# Altium PCB Main Board.PcbDoc
Units mil, origin at the board's own origin, x right, y up, seen from the top; angles counter-clockwise.
Board outline 11820 x 5900 mil, 2 copper layers (Top Layer, Bottom Layer); 43 components, 95 nets, 354 pads, 5 vias.
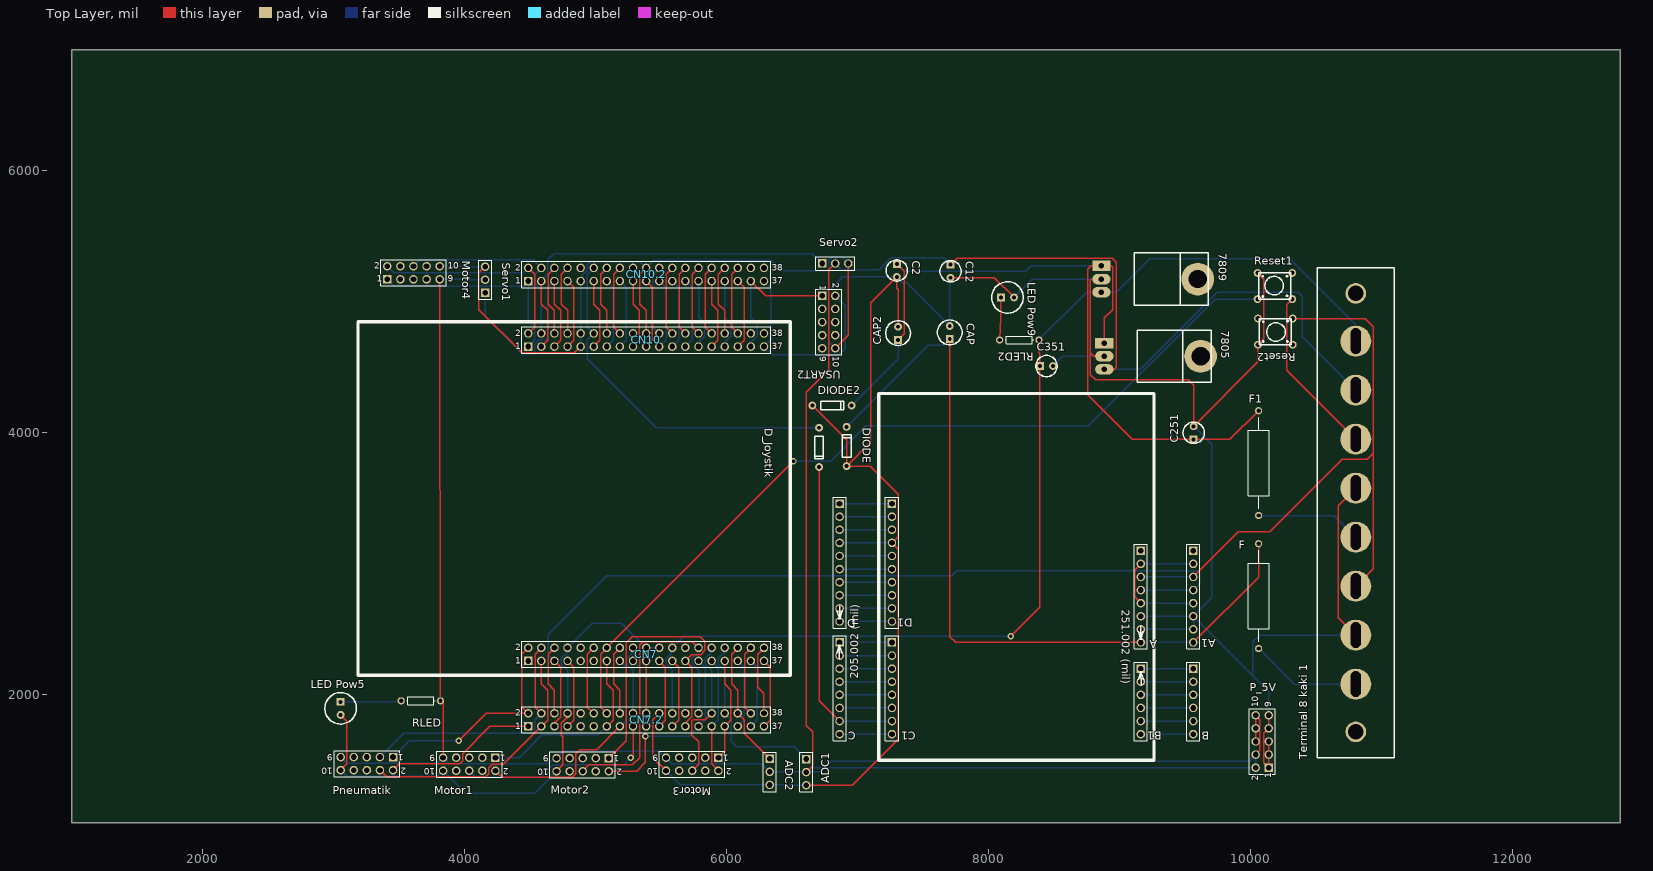
[diagram p0: Top Layer view]
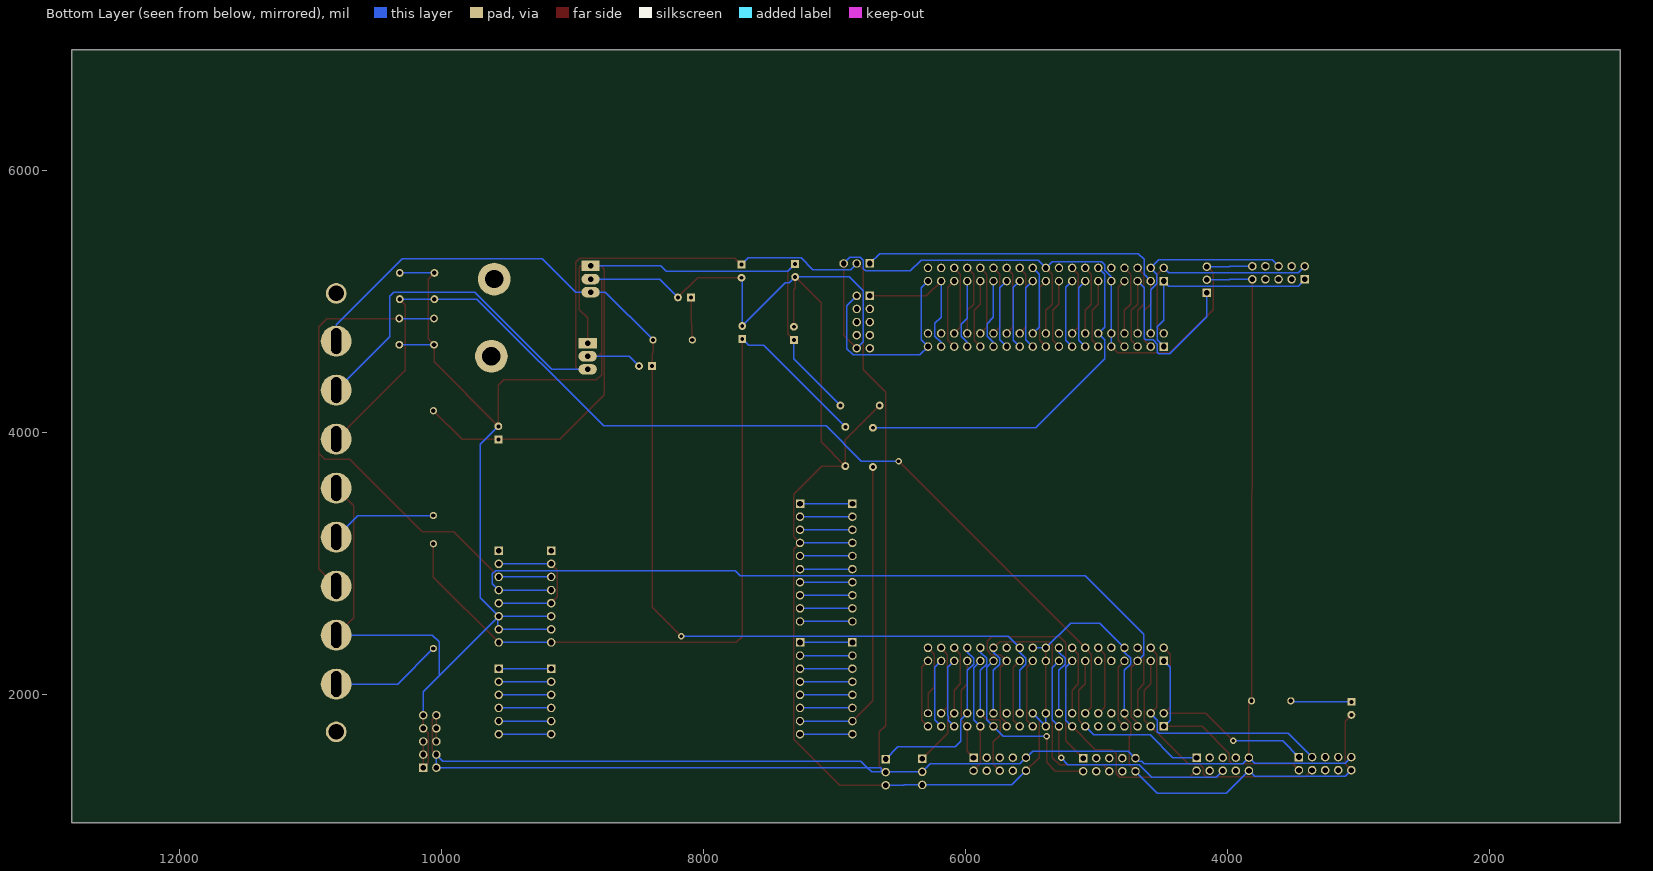
[diagram p1: Bottom Layer view, seen from below]

## Layer stack, top to bottom
Top Solder: solder mask 0.4, Solder Resist, Dk 3.5
Top Layer: signal copper 1.4
Dielectric1: dielectric 12.6, FR-4, Dk 4.8
Bottom Layer: signal copper 1.4
Bottom Solder: solder mask 0.4, Solder Resist, Dk 3.5

## Board outline
1000,1020 1000,6920 12820,6920 12820,1020

## Design rules (kind name [scope] priority, off if disabled: settings)
Clearance [All] p1: gap=10
PolygonConnect [All] p1: connectstyle=Relief reliefconductorwidth=10 reliefentries=4 polygonreliefangle="90 Angle" airgapwidth=10
RoutingVias [All] p1: holewidth=28 width=50 viastyle="Through Hole" minholewidth=28 minwidth=50 maxholewidth=28 maxwidth=50
SilkToSolderMaskClearance SilkscreenOverComponentPads [IsPad] p1: minsilkscreentomaskgap=10 clearancetoexposedcopper=TRUE
SolderMaskExpansion [All] p1: expansion=4
Width [All] p1: maxlimit=10 minlimit=10 preferedwidth=10
29 further rules are at their usual default settings.

## Components (designator, comment, footprint, x,y, rotation, side; value= is the part's Value field where it differs from the comment)
7805 "7805" 78XX/79XX 9122,5063 r0 top
7809 "7809" 78XX/79XX 9100,5652 r0 top
A "Header 8" HDR1X8 9161,3096 r270 top
A1 "Header 8" HDR1X8 9561,3096 r270 top
ADC1 "Header 3" HDR1X3 6607,1506 r270 top
ADC2 "Header 3" HDR1X3 6328,1508 r270 top
B "Header 6" HDR1X6 9561,2196 r270 top
B1 "Header 6" HDR1X6 9161,2196 r270 top
C "Header 8" HDR1X8 6861,2396 r270 top
C1 "Header 8" HDR1X8 7261,2396 r270 top
C2 "cap 1uF/50V" "cap 1uF/50V" 7298,5586 r270 top
C12 "cap 1uF/50V" "cap 1uF/50V" 7708,5580 r270 top
C251 "cap 1uF/50V" "cap 1uF/50V" 9564,3646 r90 top
C351 "cap 1uF/50V" "cap 1uF/50V" 8090,4506 r0 top
CAP "cap 10uF/16V" "cap 10uF/16V" 7702,4812 r90 top
CAP2 "cap 10uF/16V" "cap 10uF/16V" 7308,4806 r90 top
CN7 "Header 19X2" HDR2X19#1 4484,2255 r0 top
CN7.2 "Header 19X2" HDR2X19#2 4484,1755 r0 top
CN10 "Header 19X2" HDR2X19#1 4484,4655 r0 top
CN10.2 "Header 19X2" HDR2X19#1 4484,5155 r0 top
D "Header 10" HDR1X10 6861,3456 r270 top
D1 "Header 10" HDR1X10 7261,3456 r270 top
D_Joystik "Zener" "D Zener" 6605,4035 r270 top
DIODE "Zener" "D Zener" 7015,3742 r90 top
DIODE2 "Zener" "D Zener" 6653,4105 r0 top
F "Inductor Adj" AXIAL-0.8 10060,2750 r90 top
F1 "Inductor Adj" AXIAL-0.8 10060,3765 r90 top
"LED Pow5" "LED sedang" "LED sedang" 3052,1743 r270 top
"LED Pow9" "LED sedang" "LED sedang" 8293,5030 r0 top
Motor1 "Header 5X2" HDR2X5 4234,1517 r180 top
Motor2 "Header 5X2" HDR2X5 5100,1513 r180 top
Motor3 "Header 5X2" HDR2X5 5936,1517 r180 top
Motor4 "Header 5X2" HDR2X5 3408,5168 r0 top
P_5V "Header 5X2" HDR2X5 10137,1440 r90 top
Pneumatik "Header 5X2" HDR2X5 3452,1521 r180 top
Reset1 "pushbutton" pushbutton 10617,5118 r0 top
Reset2 "pushbutton" pushbutton 9755,4768 r180 top
RLED "Res1" AXIAL-0.3 3664,1950 r0 top
RLED2 "Res1" AXIAL-0.3 8233,4705 r0 top
Servo1 "Header 3" HDR1X3 4155,5065 r90 top
Servo2 "Header 3" HDR1X3 6728,5289 r0 top
"Terminal 8 kaki 1" "Terminal Blok 8 Kaki Besar" "TERMINAL 8 KAKI" 11097,1517 r90 top
USART2 "Header 5X2" HDR2X5 6728,5042 r270 top

## Footprints (in the part's own frame and the unit in brackets; to place one, negate y for a bottom-side part, rotate by r counter-clockwise, add the part's x,y. Pads: shape width x height; smd on the part's side, far side on the other; paste and mask are expansions set on the pad)
78XX/79XX [mil]
  round 250 hole 140: 0(495,-482)
  rect 140x80 hole 42: 1(-240,-382)
  oval 140x80 hole 42: 2(-240,-482) 3(-240,-582)
  silkscreen extent 10,-682 575,-282
AXIAL-0.3 [mm] "Axial Device, Thru-Hole; 2 Leads; 0.3 in Pin Spacing"
  round 1.4 hole 0.85: 1(-3.81,0) 2(3.81,0)
  silkscreen extent -2.77,-0.76 2.77,0.76
AXIAL-0.8 [mm] "Axial Device, Thru-Hole; 2 Leads; 0.8 in Pin Spacing"
  round 1.4 hole 0.85: 1(-10.16,0) 2(10.16,0)
  silkscreen extent -8.89,-2.03 8.89,2.03
"cap 1uF/50V" [mil]
  rect 60x60 hole 30: 1(300,0)
  round 60 hole 30: 2(400,0)
  silkscreen extent 269,-81 432,81
"cap 10uF/16V" [mil]
  rect 60x60 hole 30: 1(-100,0)
  round 60 hole 30: 2(0,0)
  silkscreen extent -144,-95 46,95
"D Zener" [mil]
  round 60 hole 30: 1(0,100) 2(300,100)
  silkscreen extent 66,66 238,132
HDR1X3 [mm] "Connector; Header; 3 Position"
  rect 1.65x1.65 hole 1.1: 1(0,0)
  round 1.65 hole 1.1: 2(2.54,0) 3(5.08,0)
  silkscreen extent -1.27,-1.27 6.35,1.27
HDR1X6 [mm] "Connector; Header; 6 Position"
  rect 1.65x1.65 hole 1.1: 1(0,0)
  round 1.65 hole 1.1: 2(2.54,0) 3(5.08,0) 4(7.62,0) 5(10.16,0) 6(12.7,0)
  silkscreen extent -1.27,-1.27 13.97,1.27
HDR1X8 [mm] "Connector; Header; 8 Position"
  rect 1.65x1.65 hole 1.1: 1(0,0)
  round 1.65 hole 1.1: 2(2.54,0) 3(5.08,0) 4(7.62,0) 5(10.16,0) 6(12.7,0) 7(15.24,0) 8(17.78,0)
  silkscreen extent -1.27,-1.27 19.05,1.27
HDR1X10 [mm] "Connector; Header; 10 Position"
  rect 1.65x1.65 hole 1.1: 1(0,0)
  round 1.65 hole 1.1: 2(2.54,0) 3(5.08,0) 4(7.62,0) 5(10.16,0) 6(12.7,0) 7(15.24,0) 8(17.78,0) 9(20.32,0) 10(22.86,0)
  silkscreen extent -1.27,-1.27 24.13,1.27
HDR2X5 [mm] "Connector; Header; 5x2 Position"
  rect 1.65x1.65 hole 1.1: 1(0,0)
  round 1.65 hole 1.1: 2(0,2.54) 3(2.54,0) 4(2.54,2.54) 5(5.08,0) 6(5.08,2.54) 7(7.62,0) 8(7.62,2.54) 9(10.16,0) 10(10.16,2.54)
  silkscreen extent -1.27,-1.27 11.43,3.81
HDR2X19#1 [mm] "Connector; Header; 19x2 Position"
  rect 1.65x1.65 hole 1.1: 1(0,0)
  round 1.65 hole 1.1: 2(0,2.54) 3(2.54,0) 4(2.54,2.54) 5(5.08,0) 6(5.08,2.54) 7(7.62,0) 8(7.62,2.54) 9(10.16,0) 10(10.16,2.54) 11(12.7,0) 12(12.7,2.54) 13(15.24,0) 14(15.24,2.54) 15(17.78,0) 16(17.78,2.54) 17(20.32,0) 18(20.32,2.54) 19(22.86,0) 20(22.86,2.54) 21(25.4,0) 22(25.4,2.54) 23(27.94,0) 24(27.94,2.54) 25(30.48,0) 26(30.48,2.54) 27(33.02,0) 28(33.02,2.54) 29(35.56,0) 30(35.56,2.54) 31(38.1,0) 32(38.1,2.54) 33(40.64,0) 34(40.64,2.54) 35(43.18,0) 36(43.18,2.54) 37(45.72,0) 38(45.72,2.54)
  silkscreen extent -1.27,-1.27 46.99,3.81
HDR2X19#2 [mm] "Connector; Header; 19x2 Position"
  rect 1.65x1.65 hole 1.1: 1(0,0)
  round 1.65 hole 1.1: 2(0,2.54) 3(2.54,0) 4(2.54,2.54) 5(5.08,0) 6(5.08,2.54) 7(7.62,0) 8(7.62,2.54) 9(10.16,0) 10(10.16,2.54) 11(12.7,0) 12(12.7,2.54) 13(15.24,0) 14(15.24,2.54) 15(17.78,0) 16(17.78,2.54) 17(20.32,0) 18(20.32,2.54) 19(22.86,0) 20(22.86,2.54) 21(25.4,0) 22(25.4,2.54) 23(27.94,0) 24(27.94,2.54) 25(30.48,0) 26(30.48,2.54) 27(33.02,0) 28(33.02,2.54) 29(35.56,0) 30(35.56,2.54) 31(38.1,0) 32(38.1,2.54) 33(40.64,0) 34(40.64,2.54) 35(43.18,0) 36(43.18,2.54) 37(45.72,0)
  oval 1.65x1.5 hole 1.1: 38(45.72,2.54)
  silkscreen extent -1.27,-1.27 46.99,3.81
"LED sedang" [mil]
  rect 60x60 hole 30: 1(-200,0)
  round 60 hole 30: 2(-100,0)
  silkscreen extent -270,-120 -30,120
pushbutton [mil]
  round 60 hole 35: 1(-565,-101) 1(-300,-101) 2(-565,99) 2(-300,99)
  silkscreen extent -555,-101 -310,99
"TERMINAL 8 KAKI" [mm] "Terminal Blok Hitam 8 Kaki"
  round 6 hole 2 slot 5 at 0 deg: 1(14.25,7.5) 2(23.75,7.5) 3(33.25,7.5) 4(42.75,7.5) 5(52.25,7.5) 6(61.75,7.5) 7(71.25,7.5) 8(80.75,7.5)
  round 4 hole 3: " "(5,7.5) " "(90,7.5)
  silkscreen extent 0,0 95,15

## Part data
7805 7809: library part 7805/7809/7812/7905/7909/7912
A A1 C C1: "Header, 8-Pin"
ADC1 ADC2 Servo1 Servo2: "Header, 3-Pin"
B B1: "Header, 6-Pin"
CN7 CN7.2 CN10 CN10.2: "Header, 19-Pin, Dual row"
D D1: "Header, 10-Pin"
D_Joystik DIODE DIODE2: library part "D Zener"
F F1: "Adjustable Inductor"
Motor1 Motor2 Motor3 Motor4 P_5V Pneumatik USART2: "Header, 5-Pin, Dual row"
RLED RLED2: "Resistor"
"Terminal 8 kaki 1": library part "Terminal Block 8 kaki"

## Via types
v1: diameter 50, hole 28, Top Layer to Bottom Layer, 5 vias

## Nets (pads, with @x,y where several pads share a name; then routed paths per layer and width w, separated by ;. In a path a pad name is that pad's centre, name@x,y a point inside that pad or via, vN(x,y) a via of type N, cw(c..) or ccw(c..) an arc to the next point about the centre after c; other vN are vias at no path point)
3.3V: A1.4 A.4 CN7.2.5 CN7.5 | length 6491.9
  Top Layer w10: CN7.2.5 4684,1781 4732,1829 4732,2207 CN7.5
  Bottom Layer w10: CN7.5 4636,2303 4636,2460 5082,2906 7718,2906 7756,2944 9585,2944 9609,2920 9609,2844 A1.4 A.4
3V3: CN7.2.16 CN7.16 | length 539.8
  Top Layer w10: CN7.2.16 5184,2031 5136,2079 5136,2307 CN7.16
5V: CN7.2.18 CN7.18 | length 539.3
  Bottom Layer w10: CN7.2.18 5284,2183.28 5236.52,2230.76 5236.52,2274.67 5284,2322.15 CN7.18
"A4 - SDA": D1.2 D.2 | length 400
  Bottom Layer w10: D.2 D1.2
"A5 SCL": D1.1 D.1 | length 400
  Bottom Layer w10: D.1 D1.1
AGND: CN10.2.32 CN10.32 | length 539.8
  Top Layer w10: CN10.32 5984,4931 5936,4979 5936,5207 CN10.2.32
ANALOG0: B1.1 B.1 | length 400
  Bottom Layer w10: B1.1 B.1
ANALOG1: B1.2 B.2 | length 400
  Bottom Layer w10: B1.2 B.2
ANALOG2: B1.3 B.3 | length 400
  Bottom Layer w10: B1.3 B.3
ANALOG3: B1.4 B.4 | length 400
  Bottom Layer w10: B1.4 B.4
"ANALOG4 - SDA": B1.5 B.5 | length 400
  Bottom Layer w10: B1.5 B.5
"ANALOG5 - SCL": B1.6 B.6 | length 400
  Bottom Layer w10: B1.6 B.6
AREF: D1.3 D.3 | length 400
  Bottom Layer w10: D.3 D1.3
AVDD: CN10.2.7 CN10.7 | length 539.8
  Top Layer w10: CN10.7 4832,4703 4832,5107 CN10.2.7
BOOT0: CN7.2.7 CN7.7 | length 539.8
  Top Layer w10: CN7.2.7 4832,1803 4832,2207 CN7.7
E5V: CN7.2.6 CN7.6 | length 539.8
  Top Layer w10: CN7.2.6 4684,2031 4636,2079 4636,2307 CN7.6
FUSE1: "Terminal 8 kaki 1.1" F.1 | length 854.4
  Bottom Layer w10: F.1 10331.98,2078.02 10801.72,2078.02
FUSE2: "Terminal 8 kaki 1.4" F1.1 | length 810
  Bottom Layer w10: F1.1 10636.79,3365 10801.72,3200.07
GND: 7805.2 7809.2 "LED Pow5.2" "LED Pow9.2" "Terminal 8 kaki 1.2" "Terminal 8 kaki 1.5" A1.6 A1.7 A.6 A.7 ADC1.3 ADC2.3 C2.2 C12.2 C251.2 C351.2 CAP2.2 CAP.2 CN7.2.8 CN7.2.19 CN7.2.20 CN7.2.22 CN7.8 CN7.19 CN7.20 CN7.22 CN10.2.9 CN10.2.20 CN10.9 CN10.10 CN10.20 D1.4 D.4 DIODE2.1 DIODE.1 Motor1.10 Motor2.10 Motor3.10 Motor4.10 P_5V.1 P_5V.3 P_5V.5 P_5V.7 P_5V.9 Pneumatik.10 Reset1.2 Reset2.2 Servo1.3 Servo2.3 USART2.10 | length 32474.6
  Top Layer w10: Pneumatik.10 3100,1469 3100,1795 3052,1843 ; Servo1.3 4107,5217 4107,4937 4437,4607 4836,4607 CN10.9 ; Motor2.10 4748,1461 4748,1676 4736,1688 4736,1780 4775,1819 4784,1819 CN7.2.8 ; CN7.2.20 CN7.19 CN7.20 ; CN10.20 5384,4931 5336,4979 5336,5207 CN10.2.20 ; CN7.2.22 5436,1807 5436,1517 Motor3.10 ; ADC1.3 6957,1306 7309,1658 7309,3108 D1.4 7309,3204 7309,3527 7094,3742 DIODE.1 ; DIODE2.1 6915,3943 DIODE.1 ; USART2.10 6928,4742 Servo2.3 ; CAP2.2 7308,5090.16 7298,5100.16 C2.2 7100,4988 7100,3927 DIODE.1 ; C12.2 8043,5180 8193,5030 ; 7809.2 8785,5170 8775,5160 8775,4606 ; 7805.2 8800,4581 8775,4606 ; Reset1.2@10052,5217 10100,5169 10100,4714 10055,4669 10055,4537 C251.2 9564,4360 9524,4400 8815,4400 8775,4440 8775,4606 ; P_5V.5 P_5V.3 P_5V.1 10099,1478 10099,1702 P_5V.7 P_5V.9 ; 10801.72,2452.04 10668,2585.76 10668,3440.36 10801.72,3574.09
  Bottom Layer w10: Pneumatik.10 3100,1373 3790,1373 Motor1.10 4006,1245 4532,1245 Motor2.10 ; Motor4.10 3982,5268 3985,5265 Servo1.3 ; CN7.2.8 4784,2183.28 4736.52,2230.76 4736.52,2274.67 4784,2322.15 CN7.8 4972,2543 5196,2543 CN7.20 CN7.22 ; CN10.9 4893,4655 4886.77,4659.15 4884,4661 CN10.10 CN10.2.9 4884,5186.52 4934,5236.52 4934,5280 4957,5303 5336,5303 CN10.2.20 5443,5314 6337,5314 6418,5233 6761,5233 6778,5250 6778,5315 6800,5337 6880,5337 Servo2.3 ; CN7.2.20 CN7.2.19 CN7.2.22 ; Motor3.10 5645,1308 ADC2.3 6466,1308 6468,1306 ADC1.3 ; USART2.10 6778,4692 6778,5080 6884,5186 C2.2 7343,5141 7373,5141 CAP.2 7702,5172 7711,5181 C12.2 ; D.4 D1.4 ; 8193,5030 8333,5170 7809.2 ; C351.2 8565,4581 7805.2 ; A.7 A1.7 9569,2504 A1.6@9569,2588 ; A.6 A1.6 ; C251.2 9701,3909 9701,2736 A1.6 ; Reset1.2@10052,5217 Reset1.2@10317,5217 ; Reset2.2@10055,4669 Reset2.2@10320,4669 ; P_5V.9 10137,2020 10017,2140 ; 10801.72,2452.04 10069.04,2452.04 10017,2400 10017,2140 ; A1.6 A1.6@9569,2588 ; A1.6@9569,2588 10017,2140
"IO0 - RX": C1.8 C.8 | length 400
  Bottom Layer w10: C.8 C1.8
"IO1 - TX": C1.7 C.7 D_Joystik.2 | length 2403.6
  Top Layer w10: D_Joystik.2 6705,1952 C.7
  Bottom Layer w10: C.7 C1.7
"IO2 - INT0 - PWM": C1.6 C.6 | length 400
  Bottom Layer w10: C.6 C1.6
"IO3 - INT1 - PWM": C1.5 C.5 | length 400
  Bottom Layer w10: C.5 C1.5
IO4: C1.4 C.4 | length 400
  Bottom Layer w10: C.4 C1.4
"IO5 - PWM": C1.3 C.3 | length 400
  Bottom Layer w10: C.3 C1.3
"IO6 - PWM": C1.2 C.2 | length 400
  Bottom Layer w10: C.2 C1.2
IO7: C1.1 C.1 | length 400
  Bottom Layer w10: C.1 C1.1
IO8: D1.10 D.10 | length 400
  Bottom Layer w10: D.10 D1.10
"IO9 - PWM": D1.9 D.9 | length 400
  Bottom Layer w10: D.9 D1.9
"IO10 - PWM - SS": D1.8 D.8 | length 400
  Bottom Layer w10: D.8 D1.8
"IO11 - PWM - MOSI": D1.7 D.7 | length 400
  Bottom Layer w10: D.7 D1.7
"IO12 - PWM - MISO": D1.6 D.6 | length 400
  Bottom Layer w10: D.6 D1.6
"IO13 - SCK": D1.5 D.5 | length 400
  Bottom Layer w10: D.5 D1.5
IOREF: CN7.2.12 CN7.12 | length 539.8
  Top Layer w10: CN7.2.12 4936,1903 4936,2307 CN7.12
"NetLED Pow5_1": "LED Pow5.1" RLED.1 | length 464.9
  Bottom Layer w10: 3052,1943 3507,1943 RLED.1
"NetLED Pow9_1": "LED Pow9.1" RLED2.1 | length 325.3
  Top Layer w10: RLED2.1 8093,4878 8093,5030
PA_0: CN7.2.28 CN7.28 Motor2.6 | length 2360
  Top Layer w10: Motor2.6 4948,1461 5280,1461 5334,1515 5334,2380 5357,2403 5736,2403 CN7.28
  Bottom Layer w10: CN7.2.28 5784,2183.28 5736.52,2230.76 5736.52,2274.67 5784,2322.15 CN7.28
PA_1: CN7.2.30 CN7.30 Motor3.6 | length 1139.4
  Top Layer w10: Motor3.6 5784,1465 5784,1636 5731.48,1688.52 5731.48,1800.2 5738.29,1807 5836,1807 CN7.2.30
  Bottom Layer w10: CN7.2.30 5884,2183.28 5836.52,2230.76 5836.52,2274.67 5884,2322.15 CN7.30
PA_2: CN10.2.35 CN10.35 USART2.1 | length 1130.1
  Top Layer w10: CN10.2.35 6297,5042 USART2.1
  Bottom Layer w10: CN10.35 6184,4687.85 6231.48,4735.33 6231.48,4832.52 6184,4880 CN10.2.35
PA_3: CN10.2.37 CN10.37 USART2.2 | length 1641.1
  Bottom Layer w10: CN10.2.37 6337,5102 6337,4708 CN10.37 6346,4593 6856,4593 6903,4640 6903,4967 USART2.2
PA_4: ADC1.1 CN7.2.32 CN7.32 | length 1403.5
  Bottom Layer w10: CN7.32 5984,2322.15 5936.52,2274.67 5936.52,2230.76 5984,2183.28 CN7.2.32 6034,1805 6034,1640 6075,1599 6514,1599 ADC1.1
PA_5: CN10.2.11 CN10.11 | length 539.8
  Top Layer w10: CN10.11 5032,4703 5032,4931 4984,4979 CN10.2.11
PA_6: CN10.2.13 CN10.13 | length 542.2
  Bottom Layer w10: CN10.13 5131.48,4702.48 5131.48,5105.52 5082,5155 CN10.2.13
PA_7: CN10.2.15 CN10.15 | length 539.8
  Bottom Layer w10: CN10.15 5232,4703 5232,5107 CN10.2.15
PA_8: CN10.2.23 CN10.23 | length 540.6
  Bottom Layer w10: CN10.23 5633,4704 5633,5106 CN10.2.23
PA_9: CN10.2.21 CN10.21 | length 543.1
  Bottom Layer w10: CN10.21 5536,4707 5536,5103 CN10.2.21
PA_10: CN10.2.33 CN10.33 | length 539.8
  Top Layer w10: CN10.33 6132,4703 6132,5107 CN10.2.33
PA_11: CN10.2.14 CN10.14 | length 539.8
  Top Layer w10: CN10.14 5084,4931 5036,4979 5036,5207 CN10.2.14
PA_12: CN10.2.12 CN10.12 D_Joystik.1 | length 2741.1
  Bottom Layer w10: CN10.2.12 4936,5207 4936,4803 CN10.12 4936,4707 4936,4560 5461,4035 D_Joystik.1
PA_13: CN7.2.13 CN7.13 Motor1.1 | length 1488.3
  Top Layer w10: CN7.2.13 5132,1803 5132,2031 5084,2079 CN7.13
  Bottom Layer w10: Motor1.1 4414,1517 4587,1690 5019,1690 CN7.2.13
PA_14: CN7.2.15 CN7.15 Motor1.2 | length 1765.9
  Top Layer w10: Motor1.2 4286,1365 4820,1365 4848,1393 4848,1546 4880,1578 5007,1578 CN7.2.15
  Bottom Layer w10: CN7.2.15 5187,1755 5234,1802 5234,2205 CN7.15
PA_15: CN7.2.17 CN7.17 Motor1.6 | length 2105.7
  Top Layer w10: v1(5268,1515) 5284,1531 CN7.2.17
  Bottom Layer w10: Motor1.6 4084,1367 4575,1367 4671,1463 5216,1463 v1(5268,1515) ; CN7.2.17 5336,1807 5336,2203 CN7.17
PB_0: ADC2.1 CN7.2.34 CN7.34 | length 987.8
  Top Layer w10: CN7.34 6036,2307 6036,2079 6084,2031 CN7.2.34 6132,1807 6132,1704 ADC2.1
PB_1: CN10.2.24 CN10.24 | length 539.8
  Top Layer w10: CN10.24 5536,4803 5536,5207 CN10.2.24
PB_2: CN10.2.22 CN10.22 | length 539.8
  Bottom Layer w10: CN10.22 5436,4803 5436,5207 CN10.2.22
PB_3: CN10.2.31 CN10.31 | length 539.3
  Bottom Layer w10: CN10.31 5984,4687.85 6031.48,4735.33 6031.48,4824.52 5984,4872 CN10.2.31
PB_4: CN10.2.27 CN10.27 | length 539.3
  Bottom Layer w10: CN10.27 5784,4687.85 5831.48,4735.33 5831.48,4830.48 5784,4877.96 CN10.2.27
PB_5: CN10.2.29 CN10.29 | length 539.8
  Top Layer w10: CN10.29 5932,4703 5932,4931 5884,4979 CN10.2.29
PB_6: CN10.2.17 CN10.17 | length 539.8
  Top Layer w10: CN10.17 5332,4703 5332,4931 5284,4979 CN10.2.17
PB_7: CN7.2.21 CN7.21 | length 539.8
  Top Layer w10: CN7.2.21 5532,1803 5532,2207 CN7.21
PB_8: CN10.2.3 CN10.3 Servo2.1 | length 2868.8
  Top Layer w10: CN10.3 4632,4703 4632,4931 4584,4979 CN10.2.3
  Bottom Layer w10: CN10.2.3 4634,5205 4634,5320 4678,5364 6653,5364 Servo2.1
PB_9: CN10.2.5 CN10.5 Servo1.1 | length 1861.5
  Top Layer w10: CN10.5 4732,4703 4732,4931 4684,4979 CN10.2.5
  Bottom Layer w10: Servo1.1 4155,4882 4437,4600 4524,4600 4534,4610 4534,4673 4566,4705 4620,4705 4634,4719 4634,5105 CN10.2.5
PB_10: CN10.2.25 CN10.25 | length 542.2
  Bottom Layer w10: CN10.25 5735,4706 5735,5104 CN10.2.25
PB_12: CN10.2.16 CN10.16 | length 539.8
  Top Layer w10: CN10.16 5136,4803 5136,5207 CN10.2.16
PB_13: CN10.2.30 CN10.30 | length 539.8
  Top Layer w10: CN10.30 5836,4803 5836,5207 CN10.2.30
PB_14: CN10.2.28 CN10.28 | length 539.8
  Top Layer w10: CN10.28 5736,4803 5736,5207 CN10.2.28
PB_15: CN10.2.26 CN10.26 | length 539.8
  Top Layer w10: CN10.26 5636,4803 5636,5207 CN10.2.26
PC_0: CN7.2.38 CN7.38 | length 539.8
  Top Layer w10: CN7.2.38 6284,2007 6236,2055 6236,2307 CN7.38
PC_1: CN7.2.36 CN7.36 | length 539.8
  Top Layer w10: CN7.2.36 6136,1903 6136,2307 CN7.36
PC_2: CN7.2.35 CN7.35 | length 541.4
  Bottom Layer w10: CN7.2.35 6234,1805 6234,2205 CN7.35
PC_3: CN7.2.37 CN7.37 | length 539.8
  Top Layer w10: CN7.2.37 6332,1803 6332,2207 CN7.37
PC_4: CN10.2.34 CN10.34 | length 539.8
  Top Layer w10: CN10.34 6036,4803 6036,5207 CN10.2.34
PC_5: CN10.2.6 CN10.6 | length 539.8
  Top Layer w10: CN10.6 4684,4931 4636,4979 4636,5207 CN10.2.6
PC_6: CN10.2.4 CN10.4 Motor4.6 | length 1560.5
  Bottom Layer w10: Motor4.6 3656,5316 4523,5316 CN10.2.4 4536.52,5207.52 4536.52,5134.85 4584,5087.37 CN10.4
PC_7: CN10.2.19 CN10.19 | length 539.8
  Top Layer w10: CN10.19 5432,4703 5432,5107 CN10.2.19
PC_8: CN10.2 CN10.2.2 Motor4.2 | length 1652.6
  Top Layer w10: CN10.2 4532,4803 4532,5207 CN10.2.2
  Bottom Layer w10: Motor4.2 3459,5217 4446,5217 CN10.2.2
PC_9: CN10.1 CN10.2.1 Motor4.1 | length 1655.1
  Bottom Layer w10: Motor4.1 3459,5117 4446,5117 CN10.2.1 4484,4856 4535,4805 4535,4706 CN10.1
PC_10: CN7.1 CN7.2.1 Pneumatik.2 | length 1741.9
  Top Layer w10: Pneumatik.2 3500,1469 3960,1469 3984,1493 3984,1548 4191,1755 CN7.2.1
  Bottom Layer w10: CN7.2.1 4436.52,1802.48 4436.52,2207.52 CN7.1
PC_11: CN7.2 CN7.2.2 Pneumatik.1 | length 1710.1
  Top Layer w10: v1(3954,1646) 4163,1855 CN7.2.2 4436,1903 4436,2307 CN7.2
  Bottom Layer w10: Pneumatik.1 3577,1646 v1(3954,1646)
PC_12: CN7.2.3 CN7.3 Pneumatik.4 | length 1980.7
  Top Layer w10: Pneumatik.4 3404,1369 4160,1369 4184,1393 4184,1440 4209,1465 4294,1465 CN7.2.3 4632,1803 4632,2031 4584,2079 CN7.3
PC_13: CN7.2.23 CN7.23 | length 539.8
  Top Layer w10: CN7.2.23 5632,1803 5632,2207 CN7.23
PC_14: CN7.2.25 CN7.25 Motor2.1 | length 2357
  Top Layer w10: Motor2.1 5234,1647 5234,2393 5280,2439 5797,2439 5832,2404 5832,2335 5800,2303 5732,2303 CN7.25 5732,2207 5732,1829 5684,1781 CN7.2.25
PC_15: CN7.2.27 CN7.27 Motor2.2 | length 1484.8
  Top Layer w10: Motor2.2 5312,1413 5379,1480 v1(5379,1681)
  Bottom Layer w10: v1(5379,1681) 5710,1681 CN7.2.27 5834,1805 5834,2205 CN7.27
PD_2: CN7.2.4 CN7.4 Pneumatik.3 | length 1962.2
  Top Layer w10: CN7.2.4 4536,1903 4536,2307 CN7.4
  Bottom Layer w10: Pneumatik.3 3533,1702 4520,1702 4532,1714 4532,1803 CN7.2.4
PH_0: CN7.2.29 CN7.29 Motor3.2 | length 903.8
  Top Layer w10: CN7.2.29 5884,1469 Motor3.2
  Bottom Layer w10: CN7.2.29 5886,1755 5936,1805 5936,2203 CN7.29
PH_1: CN7.2.31 CN7.31 Motor3.1 | length 797.6
  Top Layer w10: Motor3.1 5984,1565 CN7.2.31 6032,1803 6032,2031 5984,2079 CN7.31
RESET: "Terminal 8 kaki 1.6" CN7.2.14 CN7.14 Reset1.1 | length 8179.9
  Top Layer w10: CN7.2.14 5036,1903 5036,2307 CN7.14 v1(6509,3780) ; Reset1.1@10317,5017 10275,4975 10275,4474.83 10801.72,3948.1
  Bottom Layer w10: v1(6509,3780) 6793,3780 7062,4049 8760,4049 9728,5017 10052,5017 Reset1.1@10317,5017
RESET_ARD: "Terminal 8 kaki 1.3" A1.3 A.3 Reset2.1 | length 5106.8
  Top Layer w10: A1.3 9905,3240 10145,3240 10698,3793 10888,3793 10935,3840 ; Reset2.1@10320,4869 10873,4869 10935,4807 10935,3840 ; 10801.72,2826.06 10935,2959.33 10935,3840
  Bottom Layer w10: A.3 A1.3 ; Reset2.1@10055,4869 Reset2.1@10320,4869
U5V: CN10.2.8 CN10.8 | length 539.8
  Top Layer w10: CN10.8 4784,4931 4736,4979 4736,5207 CN10.2.8
VBAT: CN7.2.33 CN7.33 | length 539.3
  Bottom Layer w10: CN7.2.33 6131,1802 6131,1834.37 6131.48,1834.85 6131.48,2207.52 CN7.33
VCC: 7805.3 "Terminal 8 kaki 1.7" ADC1.2 ADC2.2 C12.1 Motor1.9 Motor2.9 Motor3.9 Motor4.9 P_5V.2 P_5V.4 P_5V.6 P_5V.8 P_5V.10 Pneumatik.9 RLED.2 Servo1.2 Servo2.2 | length 25100.7
  Top Layer w10: Motor4.9 3808,3565 3814,3559 RLED.2 3834,1930 Motor1.9 ; ADC1.2 6655,1454 6655,1714 6608,1761 6608,4305 6780,4477 6780,5241 Servo2.2 ; C12.1 7758,5330 8944,5330 8974,5300 8974,4495 8960,4481 7805.3 ; P_5V.4 10070,1573 10070,1807 P_5V.10 P_5V.8 P_5V.6
  Bottom Layer w10: Pneumatik.9 3100,1473 3790,1473 Motor1.9 3882,1469 4632.52,1469 4650.75,1487.24 4674.24,1487.24 Motor2.9 4754,1567 5486,1567 Motor3.9 5584,1469 6267,1469 ADC2.2 ADC1.2@6609,1408 ; Motor4.9 3982,5168 3985,5165 Servo1.2 ; ADC1.2 ADC1.2@6609,1408 ; Servo2.2 6875.48,5241.52 7163.52,5241.52 7253,5331 7657,5331 C12.1 ; 7805.3 9156,4481 9745,5070 10364,5070 10394,5040 10394,4729.84 10801.72,4322.12 ; ADC1.2@6609,1408 6641,1408 ; 6641,1408 6715,1408 6747,1440 ; 6641,1408 6641,1440 6747,1440 ; 6747,1440 6797,1490 9987,1490 P_5V.4 P_5V.2 6747,1440
VCC2: A1.2 A1.5 A.2 A.5 | length 1139.8
  Top Layer w10: A.5 9113,2744 9113,2948 A.2
  Bottom Layer w10: A.5 A1.5 ; A.2 A1.2
VIN: 7809.3 "Terminal 8 kaki 1.8" C351.1 CN7.2.24 CN7.24 RLED2.2 | length 8526
  Top Layer w10: v1(8168,2444) 8390,2666 C351.1 8390,4602 8383,4609 RLED2.2
  Bottom Layer w10: CN7.2.24 5584,2183.28 5536.52,2230.76 5536.52,2274.67 5584,2322.15 CN7.24 5673,2444 v1(8168,2444) ; RLED2.2 8748,5070 7809.3 8975,5070 9230,5325 10299,5325 10801.72,4822.28 10801.72,4696.13
VIN2: A1.8 A.8 CAP.1 DIODE.2 F.2 | length 6174.3
  Top Layer w10: CAP.1 7702,2440 7746,2396 A.8 ; A1.8 10060,2895 F.2
  Bottom Layer w10: DIODE.2 7536,4663 7652,4663 7700,4711 CAP.1 ; A.8 A1.8
VIN12: 7805.1 7809.1 C2.1 C251.1 CAP2.1 DIODE2.2 F1.2 | length 6174.4
  Top Layer w10: C2.1 7353,5231 7353,4751 CAP2.1 ; 7805.1 8882,4873 8945,4936 8945,5260 8935,5270 7809.1 8780,5270 8755,5245 8755,4288 9097,3946 C251.1 9841,3946 F1.2
  Bottom Layer w10: DIODE2.2 7308,4560 CAP2.1 ; C2.1 7353,5231 8284,5231 8323,5270 7809.1
pads on no net: 7805.0 7809.0 "Terminal 8 kaki 1. " A1.1 A.1 CN7.2.9 CN7.2.10 CN7.2.11 CN7.2.26 CN7.9 CN7.10 CN7.11 CN7.26 CN10.2.10 CN10.2.18 CN10.2.36 CN10.2.38 CN10.18 CN10.36 CN10.38 Motor1.3 Motor1.4 Motor1.5 Motor1.7 Motor1.8 Motor2.3 Motor2.4 Motor2.5 Motor2.7 Motor2.8 Motor3.3 Motor3.4 Motor3.5 Motor3.7 Motor3.8 Motor4.3 Motor4.4 Motor4.5 Motor4.7 Motor4.8 Pneumatik.5 Pneumatik.6 Pneumatik.7 Pneumatik.8 USART2.3 USART2.4 USART2.5 USART2.6 USART2.7 USART2.8 USART2.9

## Silkscreen, mask and mechanical layers (free items; w line width, h text height)
Top Overlay:
  lines w10: 6839.71,2313.1 6860,2373 ; 6841.29,2638.1 6861,2578 ; 6850,2373.05 6870,2372.95 ; 6851,2578.05 6871,2577.95 ; 6859.51,2273 6860,2373 ; 6861.49,2678 6861,2578 ; 6879.71,2312.9 6860,2373 ; 6881.29,2637.9 6861,2578 ; 9140.76,2481.92 9161,2422 ; 9142.24,2110.92 9162,2171 ; 9151,2421.96 9171,2422.04 ; 9152,2170.96 9172,2171.04 ; 9160.6,2522 9161,2422 ; 9162.4,2071 9162,2171 ; 9180.76,2482.08 9161,2422 ; 9182.24,2111.08 9162,2171
  lines w25: 3184,2145 3184,4845 6484,4845 6484,2145 3184,2145 ; 7161,1496 9261,1496 9261,4296 7161,4296 7161,1496
  text "251.002 (mil)" at 9016.14,2646.81 h60 r270.23
  text "205.002 (mil)" at 7002.72,2118.92 h60 r89.72
Mechanical 1:
  the board outline again, w30

## Text inside footprints (layer, text, board x,y; h text height)
CN7: Top Overlay "2" at 4384,2335 h50; Top Overlay "1" at 4384,2235 h50; Top Overlay "37" at 6344,2235 h50; Top Overlay "38" at 6344,2335 h50
CN7.2: Top Overlay "2" at 4384,1835 h50; Top Overlay "1" at 4384,1735 h50; Top Overlay "37" at 6344,1735 h50; Top Overlay "38" at 6344,1835 h50
CN10: Top Overlay "2" at 4384,4735 h50; Top Overlay "1" at 4384,4635 h50; Top Overlay "37" at 6344,4635 h50; Top Overlay "38" at 6344,4735 h50
CN10.2: Top Overlay "2" at 4384,5235 h50; Top Overlay "1" at 4384,5135 h50; Top Overlay "37" at 6344,5135 h50; Top Overlay "38" at 6344,5235 h50
Motor1: Top Overlay "10" at 3774,1437 h50 r180; Top Overlay "9" at 3774,1537 h50 r180; Top Overlay "1" at 4314,1537 h50 r180; Top Overlay "2" at 4334,1437 h50 r180
Motor2: Top Overlay "10" at 4640,1433 h50 r180; Top Overlay "9" at 4640,1533 h50 r180; Top Overlay "1" at 5180,1533 h50 r180; Top Overlay "2" at 5200,1433 h50 r180
Motor3: Top Overlay "10" at 5476,1437 h50 r180; Top Overlay "9" at 5476,1537 h50 r180; Top Overlay "1" at 6016,1537 h50 r180; Top Overlay "2" at 6036,1437 h50 r180
Motor4: Top Overlay "10" at 3868,5248 h50; Top Overlay "9" at 3868,5148 h50; Top Overlay "1" at 3328,5148 h50; Top Overlay "2" at 3308,5248 h50
P_5V: Top Overlay "10" at 10057,1900 h50 r90; Top Overlay "9" at 10157,1900 h50 r90; Top Overlay "1" at 10157,1360 h50 r90; Top Overlay "2" at 10057,1340 h50 r90
Pneumatik: Top Overlay "10" at 2992,1441 h50 r180; Top Overlay "9" at 2992,1541 h50 r180; Top Overlay "1" at 3532,1541 h50 r180; Top Overlay "2" at 3552,1441 h50 r180
USART2: Top Overlay "10" at 6808,4582 h50 r270; Top Overlay "9" at 6708,4582 h50 r270; Top Overlay "1" at 6708,5122 h50 r270; Top Overlay "2" at 6808,5142 h50 r270